# Altium PCB atuador_geral.PcbDoc
Units mil, origin at the board's own origin, x right, y up, seen from the top; angles counter-clockwise.
Board outline 1700 x 1680 mil, 2 copper layers (Top Layer, Bottom Layer); 10 components, 9 nets, 30 pads, 0 vias.
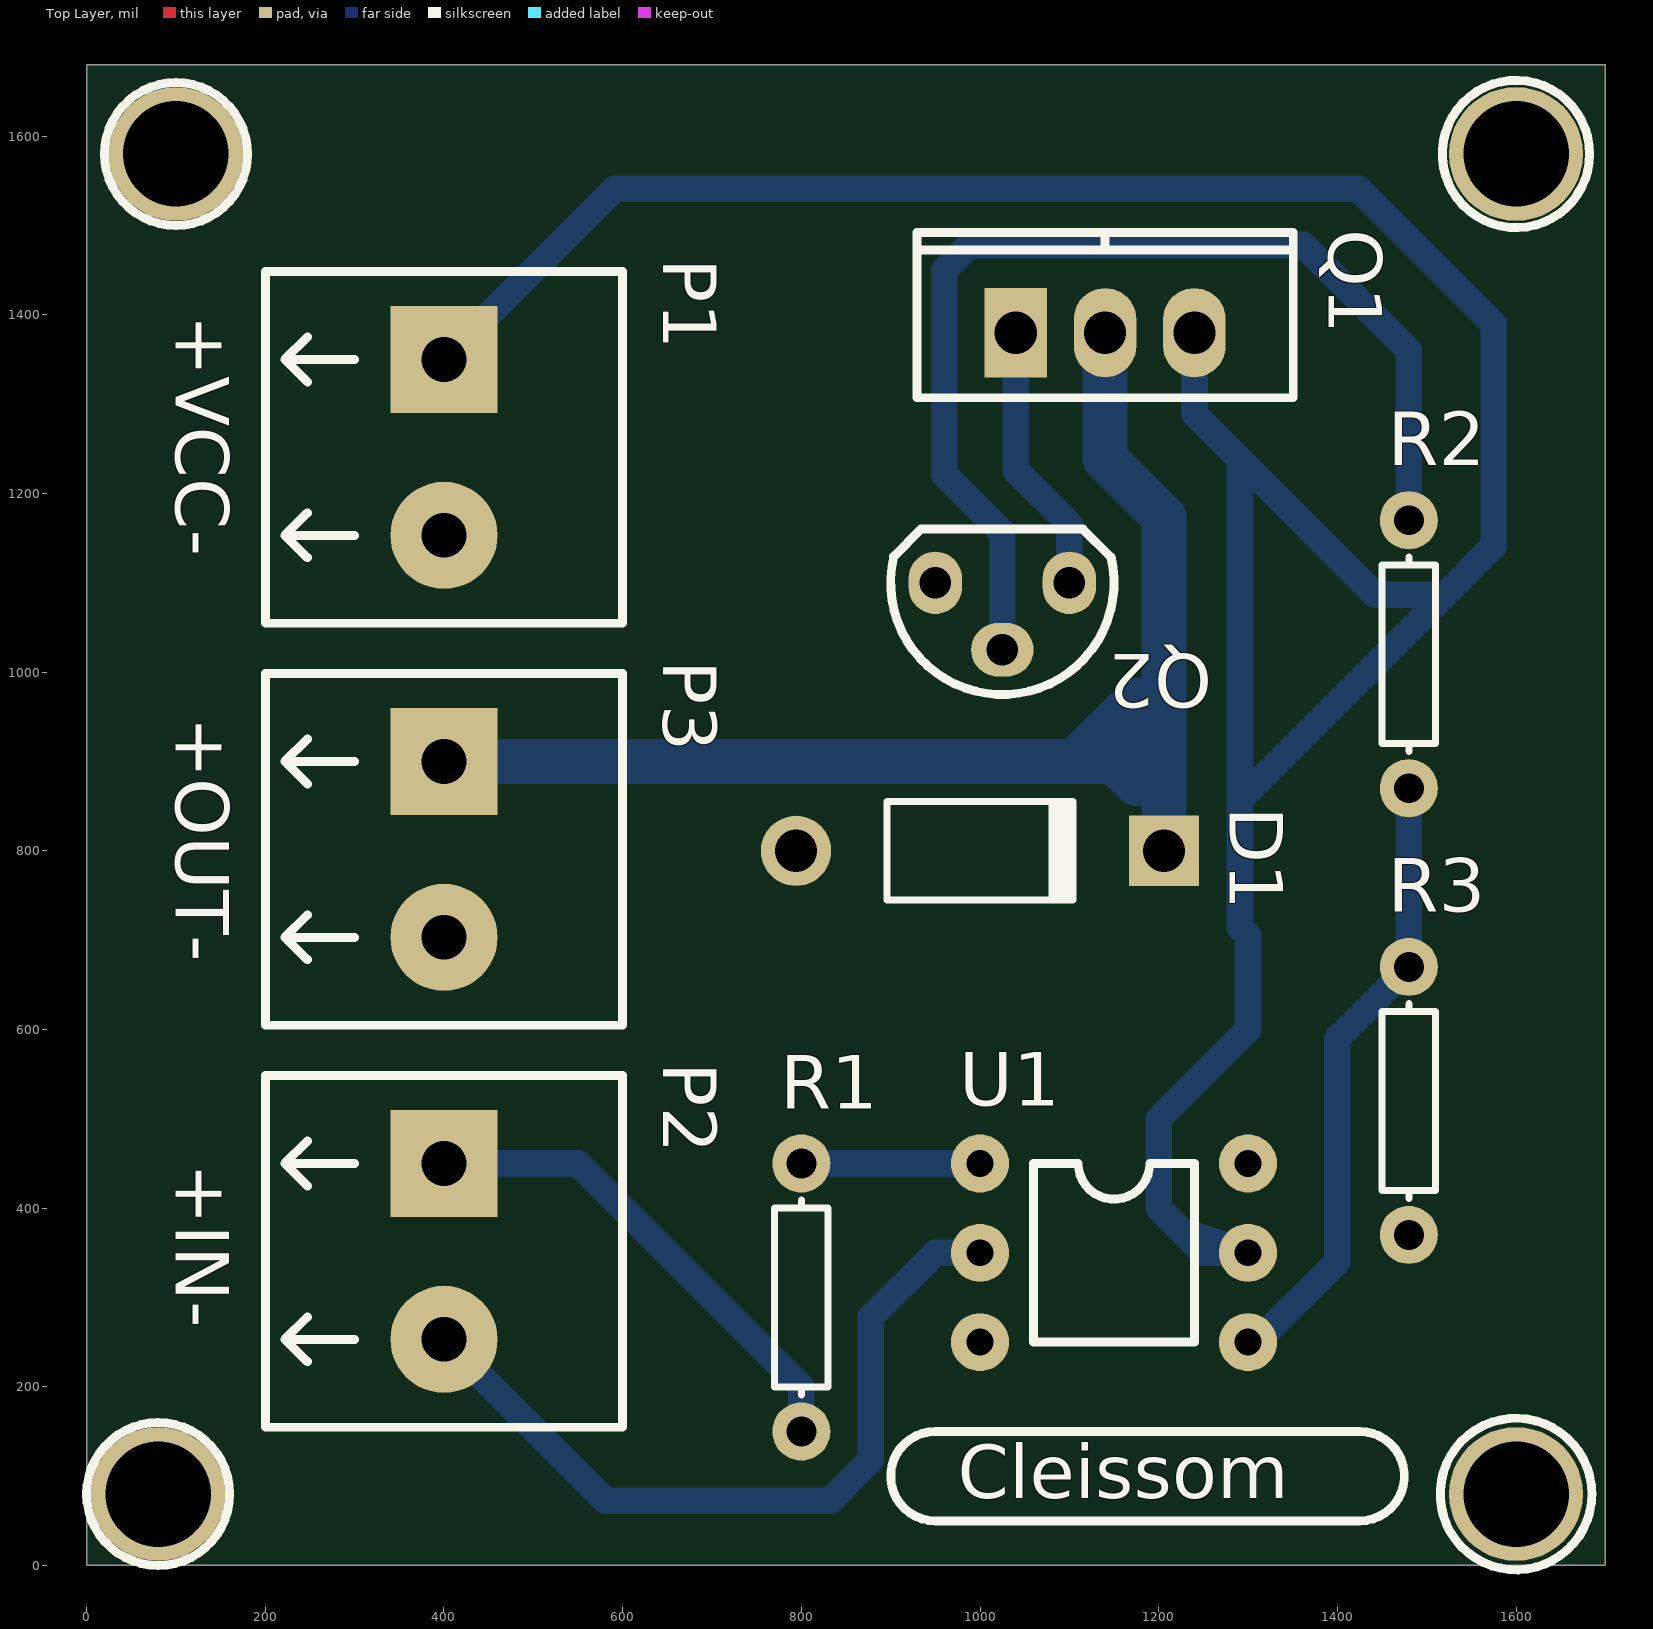
[diagram p0: Top Layer view]
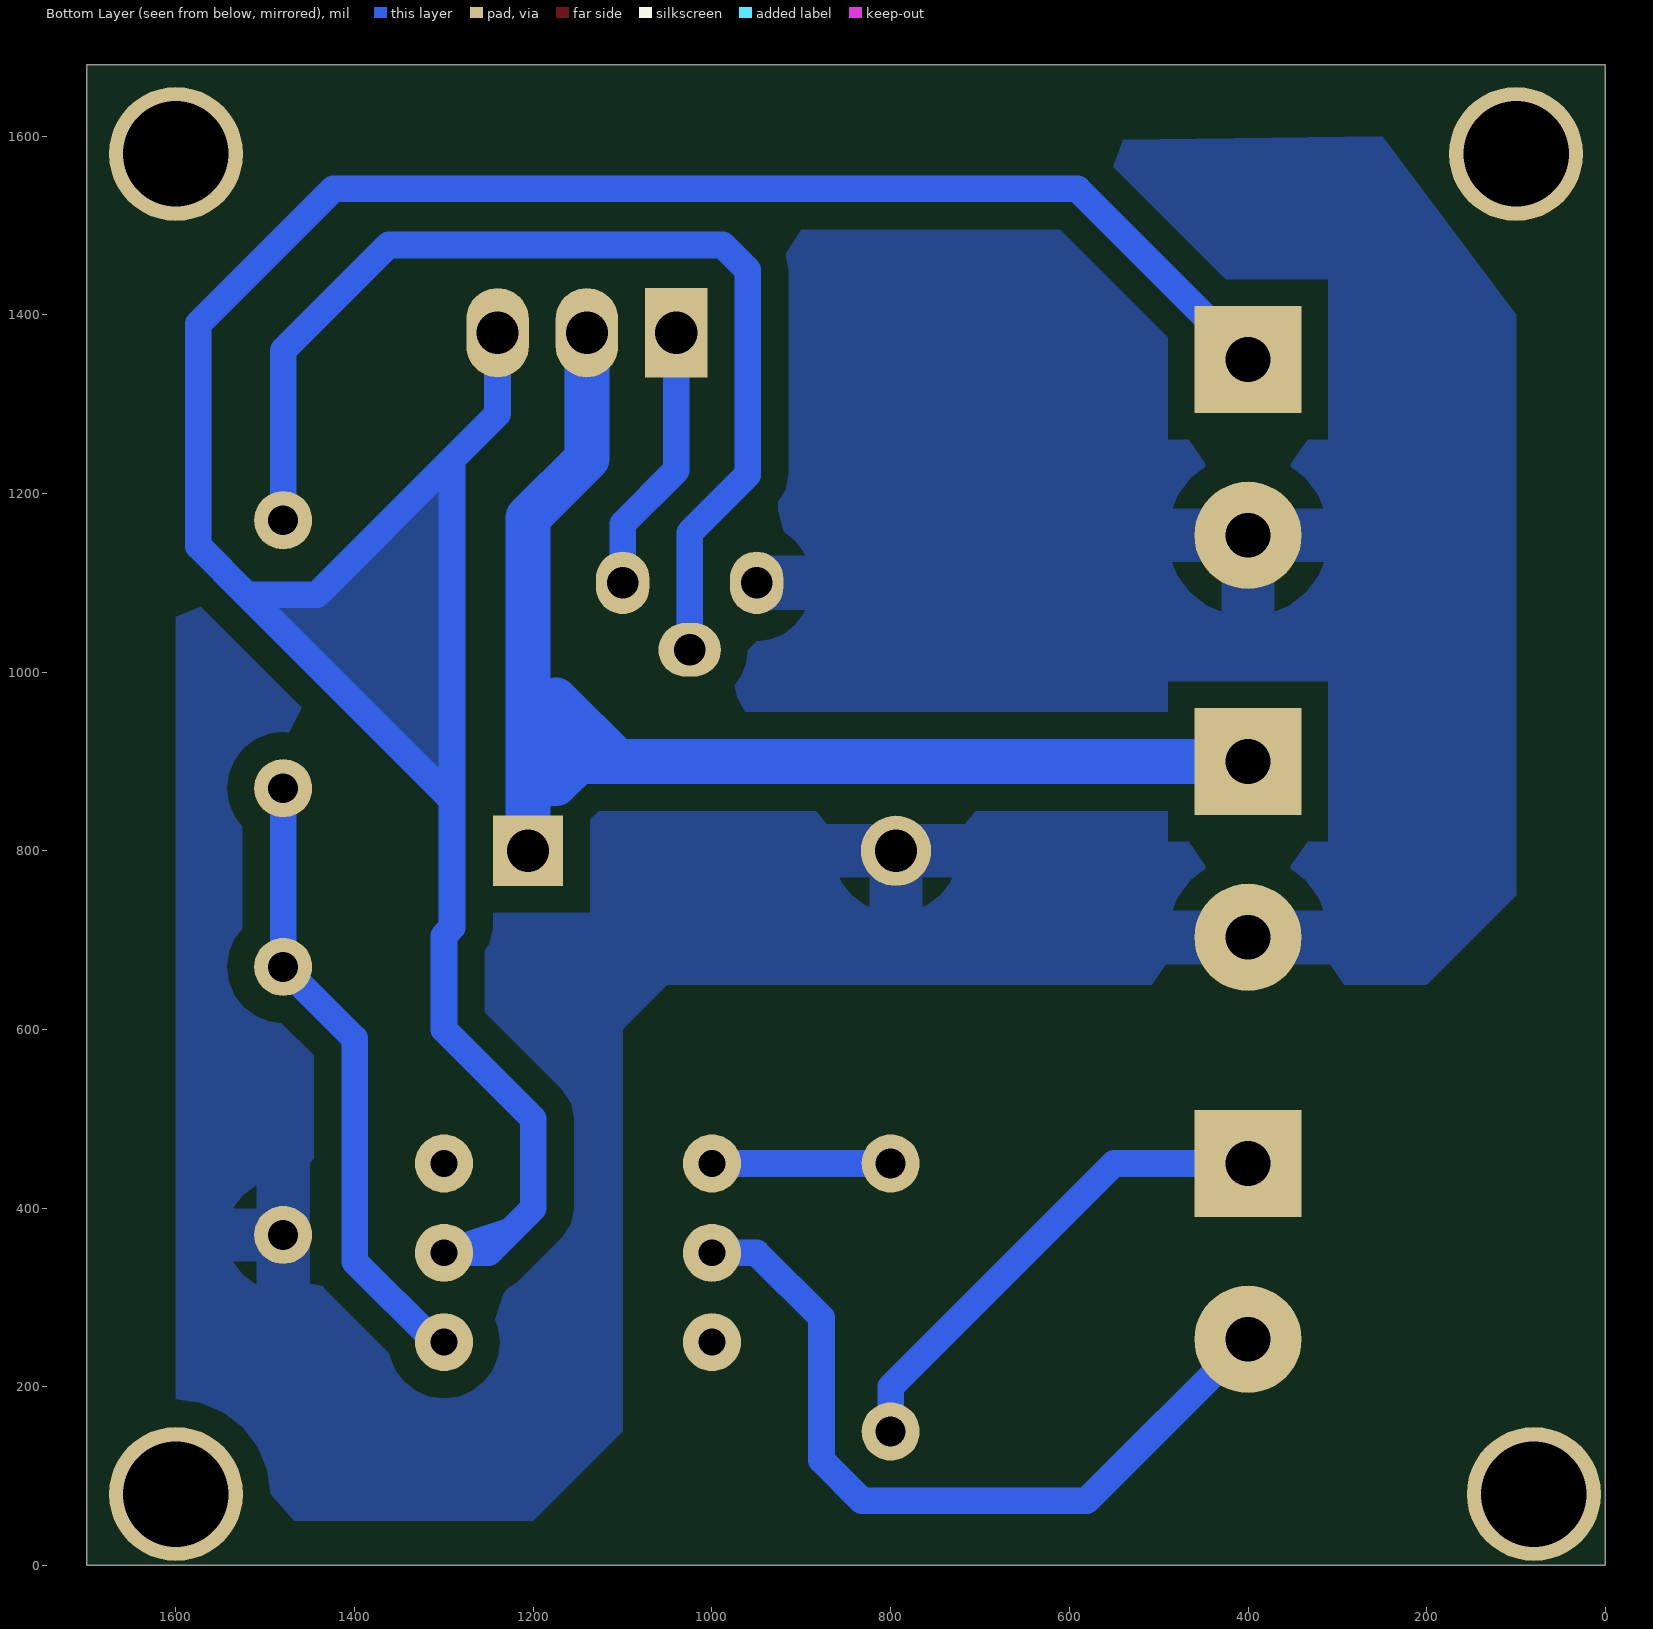
[diagram p1: Bottom Layer view, seen from below]
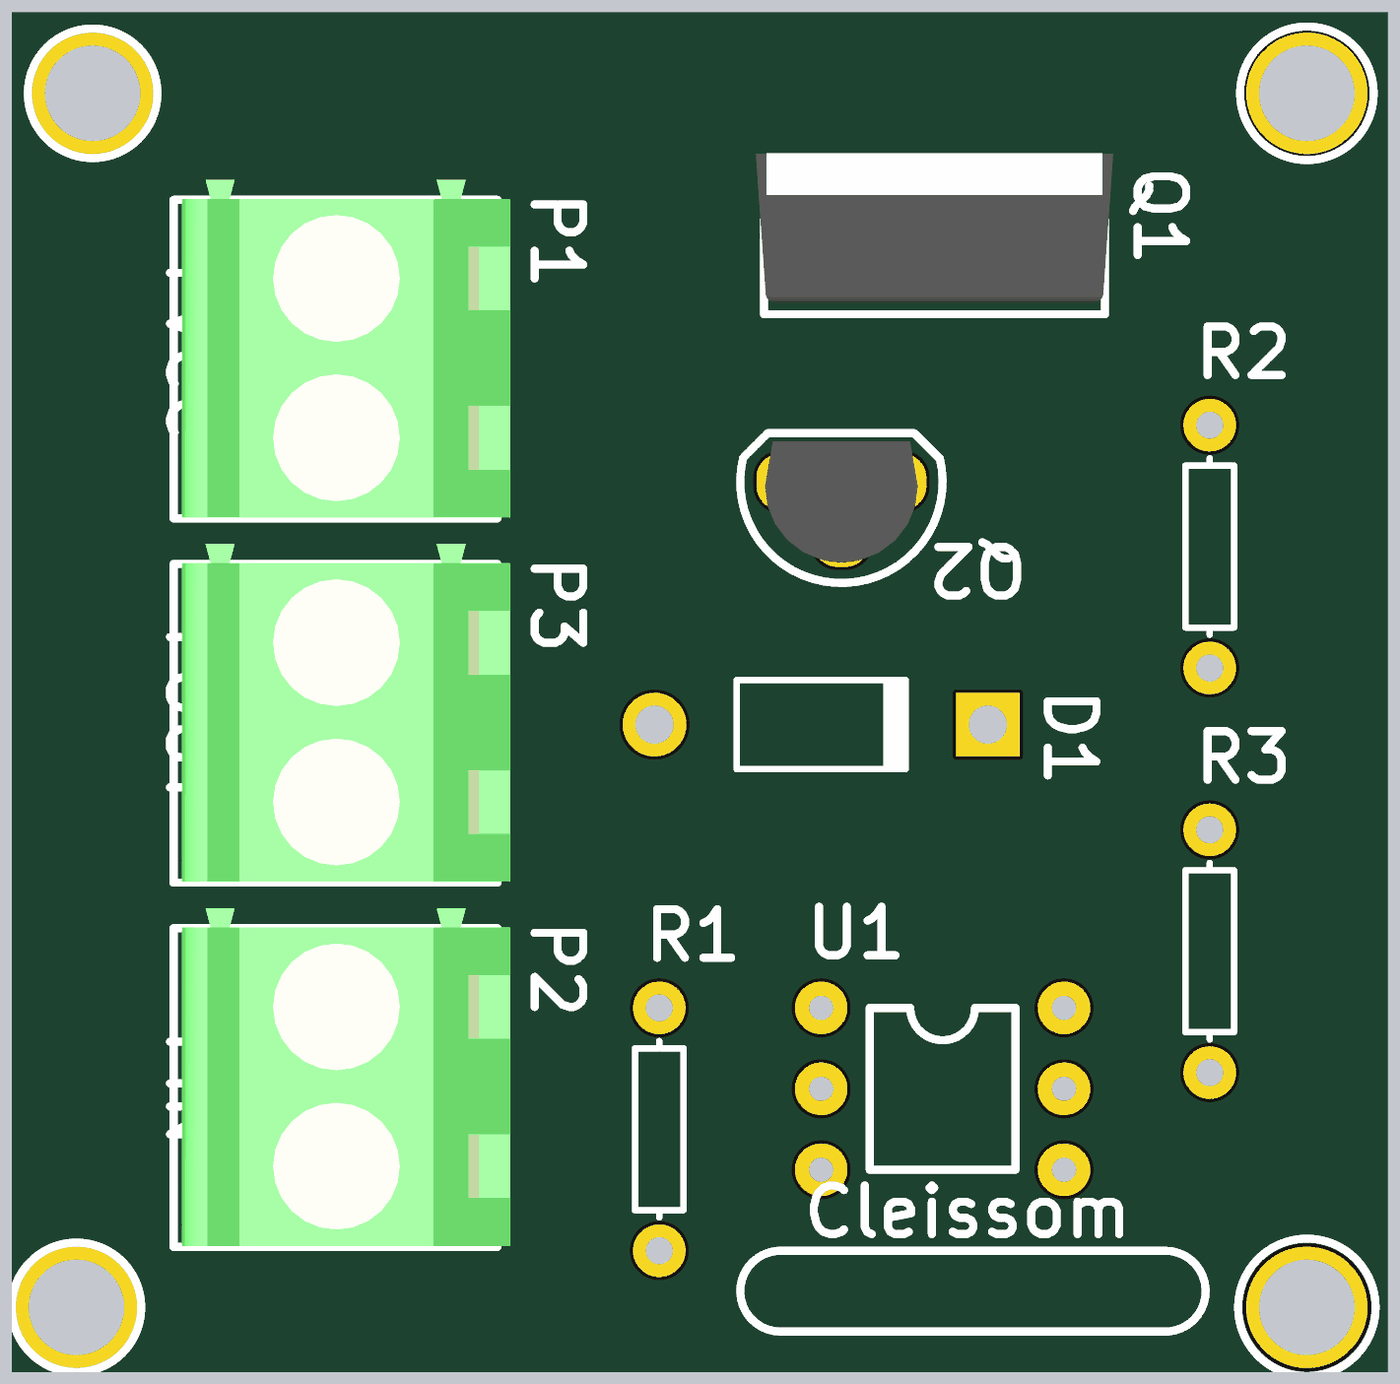
[diagram p2: 3D render of the assembled board from above, using the file's embedded part models]

## Layer stack, top to bottom
Top Solder: solder mask 0.4, Solder Resist, Dk 3.5
Top Layer: signal copper 1.4
Dielectric 1: dielectric 12.6, FR-4, Dk 4.8
Bottom Layer: signal copper 1.4
Bottom Solder: solder mask 0.4, Solder Resist, Dk 3.5

## Board outline
0,0 1700,0 1700,1680 0,1680

## Design rules (kind name [scope] priority, off if disabled: settings)
Clearance [All] p1: gap=30
PlaneClearance [All] p1: clearance=30
PlaneConnect [All] p1: planeconnectstyle=Relief reliefexpansion=30 reliefentries=4 reliefconductorwidth=60 reliefairgap=30
PolygonConnect [All] p1: connectstyle=Relief reliefconductorwidth=60 reliefentries=4 polygonreliefangle="90 Angle" airgapwidth=30
RoutingLayers [All] p1: top layer_v5=FALSE bottom layer_v5=TRUE
RoutingVias [All] p1: holewidth=28 width=50 viastyle="Through Hole" minholewidth=28 minwidth=50 maxholewidth=28 maxwidth=50
SolderMaskExpansion [All] p1: expansion=4
Width Width_NetD1 [InNet('NetD1_2')] p1: maxlimit=60 minlimit=50 preferedwidth=50
Width [All] p2: maxlimit=60 minlimit=30 preferedwidth=30
27 further rules are at their usual default settings.

## Components (designator, comment, footprint, x,y, rotation, side; value= is the part's Value field where it differs from the comment)
D1 "Diode 1N4007" DO-41 1000,800 r0 top
P1 "Terminal" KRE_2 400,1350 r270 top
P2 "Terminal" KRE_2 400,450 r270 top
P3 "Terminal" KRE_2 400,900 r270 top
Q1 "TIP32" TO-220/BCE 1040,1380 r0 top
Q2 "BC547" TO-92/CBE 1100,1100 r180 top
R1 "Res1" AXIAL-0.3 800,300 r90 top
R2 "Res1" AXIAL-0.3 1480,1020 r90 top
R3 "Res1" AXIAL-0.3 1480,520 r90 top
U1 "4N25" 4N25 1100,250 r0 top

## Footprints (in the part's own frame and the unit in brackets; to place one, negate y for a bottom-side part, rotate by r counter-clockwise, add the part's x,y. Pads: shape width x height; smd on the part's side, far side on the other; paste and mask are expansions set on the pad)
4N25 [mil]
  round 65 hole 30: 1(-100,200) 2(-100,100) 3(-100,0) 4(200,200) 5(200,100) 6(200,0)
  silkscreen extent -40,0 140,200
AXIAL-0.3 [mil] "Axial Device, Thru-Hole; 2 Leads; 0.3 in Pin Spacing"
  round 65 hole 33.46: 1(-150,0) 2(150,0)
  silkscreen extent -109,-30 109,30
DO-41 [mm] "Diode, Axial; Body 5.2 x 2.7 mm (LxDia. max), Lead Dia. 0.86 mm (max)"
  round 2 hole 1.2: 1(-5.23,0)
  rect 2x2 hole 1.2: 2(5.23,0)
  silkscreen extent -2.65,-1.4 2.75,1.4
KRE_2 [mil] "Terminal Block 2 pins"
  rect 120x120 hole 50: 1(0,0)
  round 120 hole 50: 2(196.85,0)
  silkscreen extent -98,-200 295,200, body extent -123,-190 294,216, height 559
TO-92/CBE [mil] "Transistor Outline Package, Case Style 92 CBE; 3D Sergey Atanov"
  oval 70x60 hole 35.43: B(75,75)
  oval 60x70 hole 35.43: C(0,0) E(150,0)
  silkscreen extent -50,-60 200,125, body extent -37,-50 187,100, height 239
TO-220/BCE [mil] "TO, Thru-Hole, Vertical, Heatsink Mounted; 3 In-Line Leads; Pitch 2.54 mm"
  rect 70x100 hole 47.24: B(0,0)
  oval 70x100 hole 47.24: C(100,0) E(200,0)
  silkscreen extent -111,-73 311,112, body extent -121,-59 321,126, height 832

## Part data
D1: "1 Amp General Purpose Rectifier"
P1 P2 P3: library part KRE_2, "Terminal Block 1x2"
Q1: "PNP Epitaxial Silicon Transistor"
Q2: "NPN Epitaxial Silicon Transistor"
R1 R2 R3: "Resistor"

## Free pads (board coordinates)
  round 150 hole 118.11: 0(80,80) 0(100,1580) 0(1600,80) 0(1600,1580)

## Nets (pads, with @x,y where several pads share a name; then routed paths per layer and width w, separated by ;. In a path a pad name is that pad's centre, name@x,y a point inside that pad or via, vN(x,y) a via of type N, cw(c..) or ccw(c..) an arc to the next point about the centre after c; other vN are vias at no path point)
GND: D1.1 P1.2 P3.2 Q2.E R3.1
NetD1_2: D1.2 P3.1 Q1.C | length 1659.1
  Bottom Layer w50: P3.1 1105.91,900 ; Q1.C 1140,1239 1205.91,1173.09 1205.91,875 ; D1.2 1205.91,875 ; 1105.91,900 1150,900 ; 1105.91,900 1175,969.09 1175,905.91 1180.91,900 ; 1150,900 1175,875 1205.91,875 ; 1150,900 1180.91,900 ; 1180.91,900 1205.91,875
NetP2_1: P2.1 R1.1 | length 553.6
  Bottom Layer w30: P2.1 550,450 800,200 R1.1
NetP2_2: P2.2 U1.2 | length 883.3
  Bottom Layer w30: P2.2 580.65,72.5 832.1,72.5 877.5,117.9 877.5,277.5 950,350 U1.2
NetQ1_B: Q1.B Q2.C | length 304.9
  Bottom Layer w30: Q1.B 1040,1226 1100,1166 Q2.C
NetQ2_B: Q2.B R2.2 | length 1222.3
  Bottom Layer w30: Q2.B 1025,1156 960,1221 960,1450 988,1478 1361.89,1478 1480,1359.89 R2.2
NetR1_2: R1.2 U1.1 | length 200
  Bottom Layer w30: R1.2 U1.1
NetR2_1: R2.1 R3.2 U1.6 | length 700.2
  Bottom Layer w30: U1.6 1309.6,250 1400,340.4 1400,590 R3.2 R2.1
VCC: P1.1 Q1.E U1.5 | length 3505.6
  Bottom Layer w30: P1.1 591,1541 1424,1541 1575,1390 1575,1141 1520.56,1086.56 ; 1225,375 U1.5 1250,350 1200,400 1200,500 1300,600 1300,705 1291,714 1291,857 ; Q1.E 1240,1289 1291,1238 ; 1291,857 1520.56,1086.56 ; 1291,857 1291,1238 ; 1291,1238 1442.44,1086.56 1520.56,1086.56
pads on no net: U1.3 U1.4

## Polygon pours and split planes (outlines as drawn)
GND on Bottom Layer "GND_L02_P-001" (solid, remove dead copper, pour order 2): 250,1600 1600,1580 1600,80 1570,50 1200,50 1100,150 1100,600 1050,650 200,650 100,750 100,1400
VCC on Bottom Layer "GND_L02_P-001" (solid, pour order 4): 1291,857 1300,1250 1442.44,1086.56 1500,1086.56 1500,1066

## Silkscreen, mask and mechanical layers (free items; w line width, h text height)
Top Overlay:
  circle w10: c100,1580 r80
  circle w10: c1600,1580 r82.46
  circle w10: c1600,80 r84.85
  circle w10: c80,80 r80
  lines w10: 950,50 cw(c950,100) 950,150 1425,150 cw(c1425,100) 1425,50 950,50
  text "+VCC-" at 100,1400 h60 r270
  text "+OUT-" at 100,950 h60 r270
  text "+IN-" at 100,450 h60 r270
  text "Cleissom" at 975,75 h60